# Altium PCB fabrication.PcbDoc
Units mm, origin at the board's own origin, x right, y up, seen from the top; angles counter-clockwise.
Board outline 248.67 x 56.13 mm, 2 copper layers (Top Layer, Bottom Layer), stack 1.621 mm thick; 35 components, 49 nets, 205 pads, 107 vias.
Unrouted connection lines stored in the file: 8.
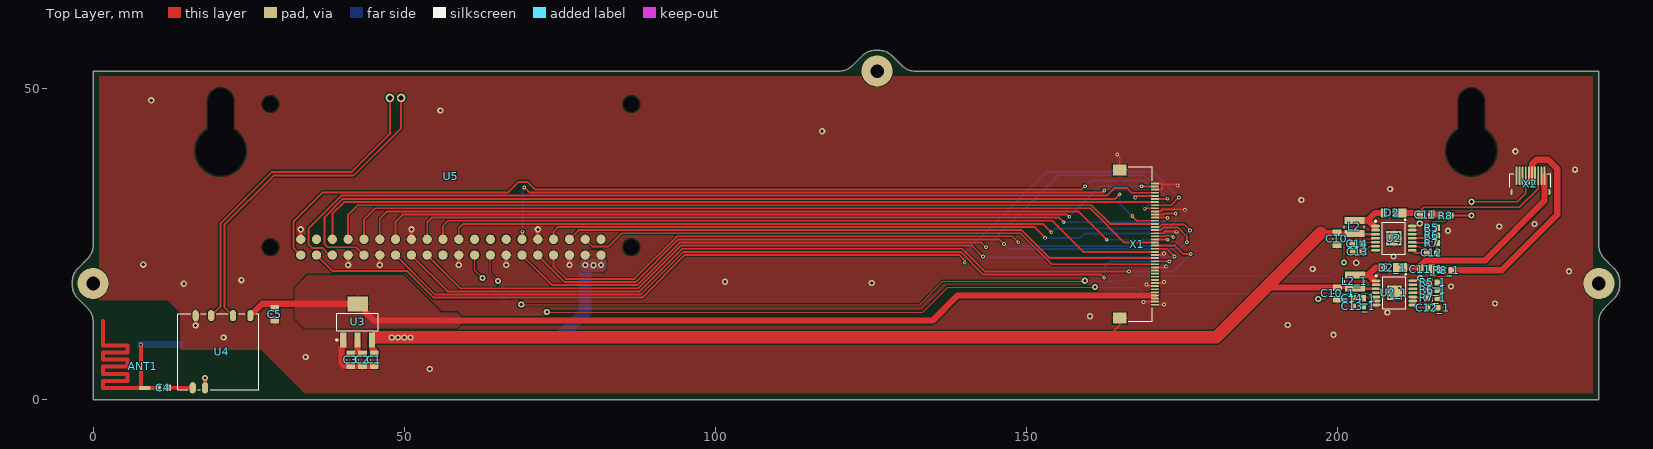
[diagram p0: Top Layer view]
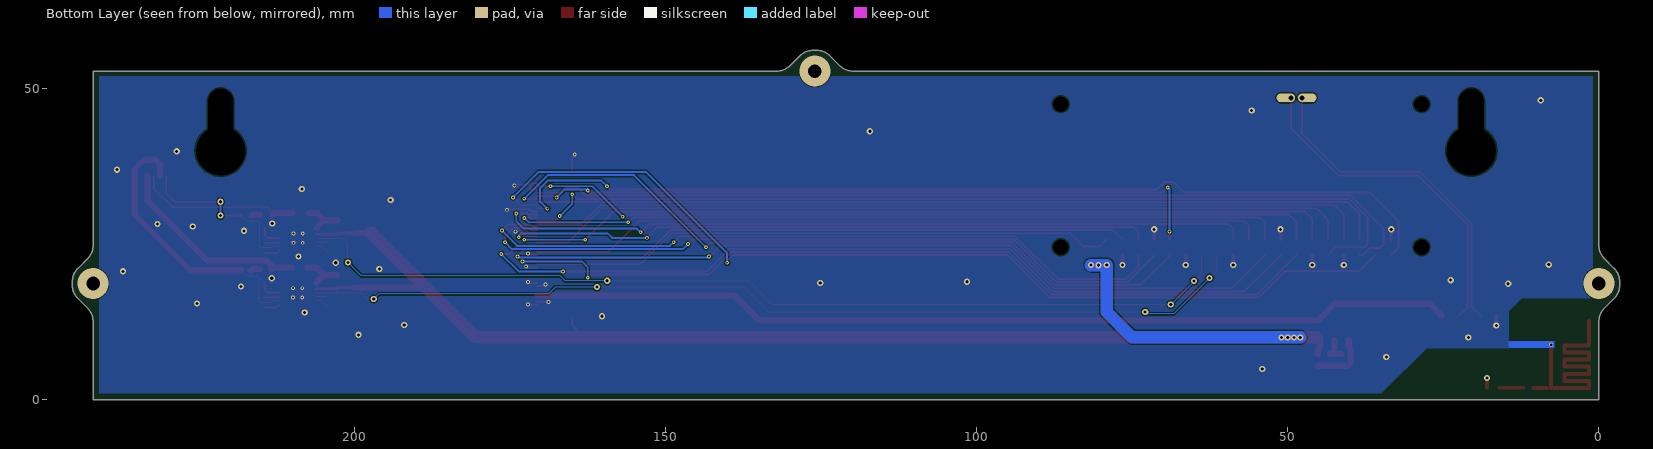
[diagram p1: Bottom Layer view, seen from below]
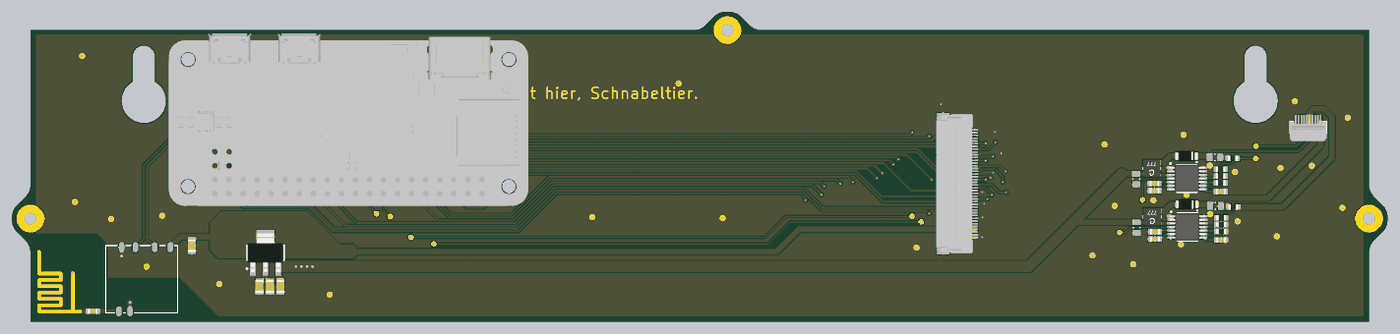
[diagram p2: 3D render of the assembled board from above, using the file's embedded part models]

## Layer stack, top to bottom
Top Solder: solder mask 0.0102, Solder Resist, Dk 3.5
Top Layer: signal copper 0.0356
Dielectric 1: dielectric 1.55, FR-4, Dk 4.8
Bottom Layer: signal copper 0.0356
Bottom Solder: solder mask 0.0102, Solder Resist, Dk 3.5

## Board outline
-0.898,14.708 -2.45,16.26 cw(c-0.316,18.394) -3.334,18.394 -3.334,18.966 cw(c-0.316,18.966) -2.45,21.1 -0.898,22.652 ccw(c-3.066,24.82) 0,24.82 0,52.8 119.86,52.8 ccw(c119.86,55.866) 122.028,53.698 123.58,55.25 cw(c125.714,53.116) 125.714,56.134 126.286,56.134 cw(c126.286,53.116) 128.42,55.25 129.972,53.698 ccw(c132.14,55.866) 132.14,52.8 242,52.8 242,24.82 ccw(c245.066,24.82) 242.898,22.652 244.45,21.1 cw(c242.316,18.966) 245.334,18.966 245.334,18.394 cw(c242.316,18.394) 244.45,16.26 242.898,14.708 ccw(c245.066,12.54) 242,12.54 242,0 0,0 0,12.54 ccw(c-3.066,12.54)

## Design rules (kind name [scope] priority, off if disabled: settings)
Clearance [All] p1: gap=0.2
ComponentClearance [All] p1 off: gap=0.254 collisioncheckmode=3 verticalgap=0.254 showdistances=FALSE
DiffPairsRouting [All] p1: maxlimit=0.3 minlimit=0.3 mostfreqgap=0.3 toplayer_minwidth=0.3 toplayer_maxwidth=0.5 toplayer_prefwidth=0.3 bottomlayer_minwidth=0.3 bottomlayer_maxwidth=0.5 bottomlayer_prefwidth=0.3 maxuncoupledlength=12.7
HoleSize [All] p1: absolutevalues=TRUE maxlimit=6.3 minlimit=0.25 maxpercent=80.000 minpercent=20.000
HoleToHoleClearance [All] p1: gap=0.152 allowstackedmicrovias=TRUE
MinimumSolderMaskSliver [All] p1: minsoldermaskwidth=0.07
PlaneClearance [All] p1: clearance=0.2
PlaneConnect [All] p1: planeconnectstyle=Direct reliefexpansion=0.3 reliefentries=4 reliefconductorwidth=0.5 reliefairgap=0.2
PolygonConnect [All vs isVia] p1: connectstyle=Direct reliefconductorwidth=0.4 reliefentries=4 polygonreliefangle="90 Angle" airgapwidth=0.15
PolygonConnect PolygonConnect_1 [All] p2: connectstyle=Relief reliefconductorwidth=0.4 reliefentries=4 polygonreliefangle="90 Angle" airgapwidth=0.15
RoutingVias [All] p1: holewidth=0.5 width=1 viastyle="Through Hole" minholewidth=0.1 minwidth=0.2 maxholewidth=10 maxwidth=15
SilkToSolderMaskClearance [IsPad] p1: minsilkscreentomaskgap=0.1 clearancetoexposedcopper=TRUE
SolderMaskExpansion [All] p1: expansion=0.051
Width [All] p1: maxlimit=10 minlimit=0.152 preferedwidth=0.5 minimp=50.000000 maximp=50.000000 favimp=50.000000
22 further rules are at their usual default settings.

## Classes and differential pairs
component class main: ANT1 C1 C2 C3 C4 C10 C11 C12 C13 C14 D2 L2 R5 R6 R7 R8 U2 U3 U4 U5 X1 X2
differential pair USB_D: +USB_D_P -USB_D_N

## Components (designator, comment, footprint, x,y, rotation, side; value= is the part's Value field where it differs from the comment)
ANT1 "ESP-ANTENNA" ESP8266_ANT 5,7 r90 top
C1 "10u 25V" C-0805-M 45.2,6.4 r90 top
C2 "10u 25V" C-0805-M 43.3,6.4 r90 top
C3 "10u 25V" C-0805-M 41.4,6.4 r90 top
C4 "NP" C-0603-M 11.3,1.9 r180 top
C5 "10u 25V" C-0805-M 29.2,13.75 r90 top (schematic designator C2)
C10 "NP" C-0805-NP 199.91,25.844 r270 top
C10_1 "NP" C-0805-NP 200,17.069 r270 top (schematic designator C10)
C11 "NP" C-0805-NP 214.134,29.755 r180 top
C11_1 "NP" C-0805-NP 214.224,20.98 r180 top (schematic designator C11)
C12 "NP" C-0603-M 215.175,23.583 r0 top
C12_1 "NP" C-0603-M 215.265,14.808 r0 top (schematic designator C12)
C13 "NP" C-0603-M 203.212,23.761 r180 top
C13_1 "NP" C-0603-M 203.302,14.986 r180 top (schematic designator C13)
C14 "NP" C-0603-M 203.2,25.044 r180 top
C14_1 "NP" C-0603-M 203.302,16.281 r180 top (schematic designator C14)
D2 "DFLS240L" powerdi-123 209.003,30.009 r180 top
D2_1 "DFLS240L" powerdi-123 209.093,21.234 r180 top (schematic designator D2)
L2 "15u" XFL3012 202.704,27.774 r180 top
L2_1 "15u" XFL3012 202.794,18.999 r180 top (schematic designator L2)
R5 "0" R-0603-M 215.175,27.622 r0 top
R5_1 "0" R-0603-M 215.265,18.847 r0 top (schematic designator R5)
R6 "0" R-0603-M 215.175,26.403 r180 top
R6_1 "0" R-0603-M 215.265,17.628 r180 top (schematic designator R6)
R7 "0" R-0603-M 215.175,25.158 r0 top
R7_1 "0" R-0603-M 215.265,16.383 r0 top (schematic designator R7)
R8 "0" R-0603-M 217.36,29.578 r0 top
R8_1 "0" R-0603-M 217.449,20.803 r0 top (schematic designator R8)
U2 "TPS61500PWP14" PWP0014E_N 209.054,25.945 r0 top
U2_1 "TPS61500PWP14" PWP0014E_N 209.144,17.17 r0 top (schematic designator U2)
U3 "AMS1117" SOT223-4 42.5,12.5 r90 top
U4 "RTL8188ETV" RTL8188ETV 20.1,7.7 r90 top
U5 "RPI Zero" PIZERO 90,51 r180 top
X1 "40P-0.5" 40P-0.5-Pollin 170,25 r90 top
X2 "FPC-0.5" 10P-0.5 231,36 r0 top

## Footprints (in the part's own frame and the unit in brackets; to place one, negate y for a bottom-side part, rotate by r counter-clockwise, add the part's x,y. Pads: shape width x height; smd on the part's side, far side on the other; paste and mask are expansions set on the pad)
10P-0.5 [mm]
  oval 0.3x1 smd: 0(-3.04,-2.65) 0(3.04,-2.65)
  oval 0.3x3 smd: 1(-2.25,0) 2(-1.75,0) 3(-1.25,0) 4(-0.75,0) 5(-0.25,0) 6(0.25,0) 7(0.75,0) 8(1.25,0) 9(1.75,0) 10(2.25,0)
  silkscreen extent -3.3,-1.9 3.3,0.3, body extent -3.35,-3.3 3.35,0.3, height 1.89
40P-0.5-Pollin [mm]
  rect 1.8x2.2 smd: 0(-11.9,5) 0(11.9,5)
  oval 0.3x1.3 smd: 1(-9.75,-0.65) 2(-9.25,-0.65) 3(-8.75,-0.65) 4(-8.25,-0.65) 5(-7.75,-0.65) 6(-7.25,-0.65) 7(-6.75,-0.65) 8(-6.25,-0.65) 9(-5.75,-0.65) 10(-5.25,-0.65) 11(-4.75,-0.65) 12(-4.25,-0.65) 13(-3.75,-0.65) 14(-3.25,-0.65) 15(-2.75,-0.65) 16(-2.25,-0.65) 17(-1.75,-0.65) 18(-1.25,-0.65) 19(-0.75,-0.65) 20(-0.25,-0.65) 21(0.25,-0.65) 22(0.75,-0.65) 23(1.25,-0.65) 24(1.75,-0.65) 25(2.25,-0.65) 26(2.75,-0.65) 27(3.25,-0.65) 28(3.75,-0.65) 29(4.25,-0.65) 30(4.75,-0.65) 31(5.25,-0.65) 32(5.75,-0.65) 33(6.25,-0.65) 34(6.75,-0.65) 35(7.25,-0.65) 36(7.75,-0.65) 37(8.25,-0.65) 38(8.75,-0.65) 39(9.25,-0.65) 40(9.75,-0.65)
  silkscreen extent -12.4,-0.2 12.4,3.6, body extent -12.45,-0.93 12.45,6.27, height 2.6
C-0603-M [mm] "Chip Resistor, Body 1.6x0.8mm, IPC Medium Density"
  rect 0.9x1 smd: 1(-0.8,0) 2(0.8,0)
  silkscreen extent -0.05,-0.4 0.05,0.4, body extent -0.85,-0.45 0.85,0.45, height 0.9
C-0805-M [mm] "Chip Resistor, Body 2.0x1.3mm, IPC Medium Density"
  rect 1.05x1.4 smd: 1(-0.95,0) 2(0.95,0)
  silkscreen extent -0.05,-0.6 0.05,0.6, body extent -1.1,-0.72 1.1,0.73, height 1.35
C-0805-NP [mm] "Chip Resistor, Body 2.0x1.3mm, IPC Medium Density"
  rect 1.05x1.4 smd: 1(-0.95,0) 2(0.95,0)
  silkscreen extent -0.05,-0.6 0.05,0.6
ESP8266_ANT [mil] "ESP8266_ANT"
  oval 25x75 smd paste-78.74: 1(-202.13,-130)
  round 25 hole 16 paste-78.74: 2(72.87,-105)
  Top Layer lines w25: 222.87,135 67.87,135 67.87,-20 22.87,-20 22.87,135 -22.13,135 -22.13,-20 -67.13,-20 -67.13,135 -112.13,135 -112.13,-20 -157.13,-20 -157.13,135 -202.13,135 -202.13,-105 72.87,-105
PIZERO [mm]
  round 1 hole 2.5 unplated: 0(3.5,26.5) 0(3.5,3.5) 0(61.5,3.5) 0(61.5,26.5)
  round 1.5 smd: 1(8.37,25.23) 2(8.37,27.77) 3(10.91,25.23) 4(10.91,27.77) 5(13.45,25.23) 6(13.45,27.77) 7(15.99,25.23) 8(15.99,27.77) 9(18.53,25.23) 10(18.53,27.77) 11(21.07,25.23) 12(21.07,27.77) 13(23.61,25.23) 14(23.61,27.77) 15(26.15,25.23) 16(26.15,27.77) 17(28.69,25.23) 18(28.69,27.77) 19(31.23,25.23) 20(31.23,27.77) 21(33.77,25.23) 22(33.77,27.77) 23(36.31,25.23) 24(36.31,27.77) 25(38.85,25.23) 26(38.85,27.77) 27(41.39,25.23) 28(41.39,27.77) 29(43.93,25.23) 30(43.93,27.77) 31(46.47,25.23) 32(46.47,27.77) 33(49.01,25.23) 34(49.01,27.77) 35(51.55,25.23) 36(51.55,27.77) 37(54.09,25.23) 38(54.09,27.77) 39(56.63,25.23) 40(56.63,27.77)
  oval 3x1.4 smd far side: 51(39.7,2.5) 52(43.1,2.5)
  round 1.4 hole 0.8: 51(40.5,2.5) 52(42.3,2.5)
  body extent 0,-1.2 65,30.03, height 4.55
powerdi-123 [mm] "SODFL, 2-Leads, Body 1,78x3,70mm, IPC Medium Density"
  rect 2.2x1.4 smd: 1(-0.95,0)
  rect 0.9x1.4 smd: 2(1.6,0)
  silkscreen extent -1.93,1.02 -1.77,1.18, body extent -1.95,-0.96 1.95,0.97, height 1
PWP0014E_N [mm] "SOP, 14-Leads, Body 5.1x4.5mm, Pitch 0.65mm, Thermal Pad 2.46x2.31mm, IPC Medium Density"
  oval 1.4x0.45 smd: 1(-2.95,1.95) 2(-2.95,1.3) 3(-2.95,0.65) 4(-2.95,0) 5(-2.95,-0.65) 6(-2.95,-1.3) 7(-2.95,-1.95) 8(2.95,-1.95) 9(2.95,-1.3) 10(2.95,-0.65) 11(2.95,0) 12(2.95,0.65) 13(2.95,1.3) 14(2.95,1.95)
  rrect4% 2.46x2.36 smd: 15(0,0)
  silkscreen extent -3.07,-2.55 1.85,2.85, body extent -3.21,-2.5 3.21,2.5, height 1
R-0603-M [mm] "Chip Resistor, Body 1.6x0.8mm, IPC Medium Density"
  rect 0.9x1 smd: 1(-0.8,0) 2(0.8,0)
  silkscreen extent -0.05,-0.4 0.05,0.4, body extent -0.87,-0.47 0.88,0.48, height 0.55
RTL8188ETV [mm]
  oval 1.8x1 smd: 1(5.8,-5.18) 2(5.8,-2.38) 3(5.8,1.12) 4(5.8,3.62) 5(-5.8,4.1) 6(-5.8,2.1)
  silkscreen extent -6.1,-6.5 6.1,6.5, body extent -6.1,-6.5 6.1,6.5, height 1.5
SOT223-4 [mm] "SOT223, 4-Leads, Body 6.5x3.5mm, Pitch 2.3mm, Lead Span 7mm, IPC Medium Density"
  rect 2.4x1 smd: 1(-2.9,2.3) 2(-2.9,0) 3(-2.9,-2.3)
  rect 2.4x3.3 smd: 4(2.9,0)
  silkscreen extent -3.02,-3.35 1.4,3.47, body extent -3.48,-3.25 3.48,3.25, height 1.7
XFL3012 [mm]
  rect 3.2x1.12 smd: 1(0,1.04) 2(0,-1.04)
  silkscreen extent -1.6,-0.2 1.6,0.2, body extent -1.6,-1.6 1.6,1.6, height 1.29

## Part data
ANT1: library part ESP-ANT
C1 C2 C3 C5: library part C-0805-10u-25V, "Capacitor 10u 25V"
C4 C12 C12_1 C13 C13_1 C14 C14_1: library part C-0603-NP, "Capacitor NP"
C10 C10_1 C11 C11_1: library part C-0805-NP
D2 D2_1: library part S-DFLS240L, "DFLS240L Schottky Diode"
L2 L2_1: library part L-XFL3012-153, "XFL3012-153MEB"
R5 R5_1 R6 R6_1 R7 R7_1 R8 R8_1: library part R-0603-0, "Resistor 0"
U2 U2_1: library part TI-TPS61500PWP14-1830X2055TP
U3: "3v3 reg"
U4: "USB WIFI MOD"
U5: library part RPI-REFLOW
X1: library part 40-0.5, "FPC connector 0.5mm pitch"
X2: library part 10-0.5mm, "FPC connector 0.5mm pitch"

## Free pads (board coordinates)
  round 1 hole 8 unplated: 0(20.5,40) 0(221.5,40)
  round 1 hole 4 slot 10 at 90 deg unplated: 0(20.5,45) 0(221.5,45)
  round 5 hole 2.2: 1(0,18.68) 1(126,52.8) 1(242,18.68)

## Via types
v1: diameter 0.6, hole 0.3, Top Layer to Bottom Layer, tented both sides, 42 vias
v2: diameter 1, hole 0.5, Top Layer to Bottom Layer, 40 vias
v3: diameter 1, hole 0.5, Top Layer to Bottom Layer, tented both sides, 17 vias
v4: diameter 0.6, hole 0.3, Top Layer to Bottom Layer, 8 vias

## Nets (pads, with @x,y where several pads share a name; then routed paths per layer and width w, separated by ;. In a path a pad name is that pad's centre, name@x,y a point inside that pad or via, vN(x,y) a via of type N, cw(c..) or ccw(c..) an arc to the next point about the centre after c; other vN are vias at no path point)
3V3: C2.2 C3.2 C5.2 U3.2 U3.4 U4.1 X1.3 X1.4 X1.5 | length 153.1
  Top Layer w1: U4.1 27.18,15.4 U3.4 45.2,12.7 134.9,12.7 138.95,16.75 X1.4 ; C3.2 42.5,7.35 ; U3.2 42.5,7.35 ; C2.2 42.5,7.35
5V: C1.2 C10.1 L2.1 U2.3 U3.3 U5.2 U5.4 | length 213.1
  Top Layer w0.45: L2.1@202.843,26.595 U2.3
  Top Layer w0.5: 197.279,26.794 C10.1 202.644,26.794 L2.1 L2.1@202.843,26.595
  Top Layer w1: U3.3 44.8,8.3 45.2,7.9 C1.2
  Top Layer w2: U3.3@45.3,10 v3(48,10) v3(49,10) v3(50,10) v3(51,10) 180.485,10 197.279,26.794
  Bottom Layer w2: v3(48,10) v3(49,10) v3(50,10) v3(51,10) 75,10 79.09,14.09 v3(79.09,21.63) v3(81.63,21.63)
  other v3: 80.4,21.6
B0: U5.7 X1.23 | length 105.7
  Top Layer w0.3: U5.7 74.01,27.01 74.75,27.75 151.25,27.75 v1(153,26) ; X1.23 172.331,26.25 172.431,26.35 173.35,26.35 v1(173.6,26.1)
  Bottom Layer w0.3: v1(153,26) 158.6,26 159.3,26.7 173.3,26.7 173.6,26.4 v1(173.6,26.1)
B1: U5.29 X1.22 | length 134.4
  Top Layer w0.3: U5.29 46.07,29.07 47.25,30.25 158.35,30.25 v1(162.9,25.7) ; X1.22 172.65,25.75 v1(172.7,25.7)
  Bottom Layer w0.3: v1(162.9,25.7) v1(172.7,25.7)
B2: U5.31 X1.21 | length 133.3
  Top Layer w0.3: U5.31 43.53,28.93 45.35,30.75 160.243,30.75 165.743,25.25 X1.21
B3: U5.26 X1.20 | length 139.5
  Top Layer w0.3: U5.26 56.98,17.4 87.828,17.4 94.678,24.25 139.65,24.25 143.3,20.6 v1(166.5,20.6) ; X1.20 173.85,24.75 175.2,23.4 v1(176.4,23.4)
  Bottom Layer w0.3: v1(166.5,20.6) 173.6,20.6 v1(176.4,23.4)
B4: U5.24 X1.19 | length 129.7
  Top Layer w0.3: U5.24 59.02,17.9 87.621,17.9 94.471,24.75 141.25,24.75 v1(143,23) ; X1.19 172.55,24.25 v1(173.8,23)
  Bottom Layer w0.3: v1(143,23) 143.15,22.85 173.65,22.85 v1(173.8,23)
B5: U5.21 X1.18 | length 119
  Top Layer w0.3: U5.21 56.23,27.93 57.05,28.75 154.15,28.75 159.15,23.75 X1.18
DATAEN: U5.28 X1.15 | length 136
  Top Layer w0.3: U5.28 54.94,16.9 88.036,16.9 94.886,23.75 139.443,23.75 143.093,20.1 162,20.1 v1(162.5,19.6) ; X1.15 172.95,22.25 v1(173,22.2)
  Bottom Layer w0.3: v1(162.5,19.6) 162.5,21.3 163.4,22.2 v1(173,22.2)
DCLK: U5.27 X1.39 | length 127.5
  Top Layer w0.3: U5.27 48.61,28.61 49.75,29.75 156.55,29.75 v1(156.9,29.4) ; v1(168.5,34.3) 168.55,34.25 X1.39
  Bottom Layer w0.3: v1(156.9,29.4) 161.8,34.3 v1(168.5,34.3)
G0: U5.19 X1.30 | length 123.2
  Top Layer w0.3: U5.19 58.77,27.57 59.45,28.25 152.65,28.25 v1(154,26.9) ; X1.30 171.95,29.75 172.1,29.9 v1(174,29.9)
  Bottom Layer w0.3: v1(154,26.9) 154.6,27.5 172.8,27.5 174,28.7 v1(174,29.9)
G1: U5.23 X1.29 | length 124.7
  Top Layer w0.3: U5.23 53.69,28.49 54.45,29.25 155.25,29.25 v1(156,28.5) ; X1.29 172.65,29.25 v1(172.7,29.2)
  Bottom Layer w0.3: v1(156,28.5) 172,28.5 v1(172.7,29.2)
G2: U5.32 X1.28 | length 149
  Top Layer w0.3: U5.32 42.26,24.5 37.7,24.5 37.2,25 37.2,29.307 40.143,32.25 164.25,32.25 v1(165,33) ; v1(167,29.5) 167.75,28.75 X1.28
  Bottom Layer w0.3: v1(165,33) 165,31.5 v1(167,29.5)
G3: U5.33 X1.27 | length 135.5
  Top Layer w0.3: U5.33 40.99,29.69 42.55,31.25 160.45,31.25 163.45,28.25 X1.27
G4: U5.8 X1.26 | length 115.7
  Top Layer w0.3: U5.8 74.01,21.39 76,19.4 87,19.4 93.85,26.25 147.75,26.25 v1(148.7,25.3) ; X1.26 171.357,27.75 171.757,28.15 175.35,28.15 v1(176.3,27.2)
  Bottom Layer w0.3: v1(148.7,25.3) 149.3,24.7 173.8,24.7 v1(176.3,27.2)
G5: U5.10 X1.25 | length 116.9
  Top Layer w0.3: U5.10 71.47,23.223 75.793,18.9 87.207,18.9 94.057,25.75 145.65,25.75 v1(146.4,25) ; X1.25 171.564,27.25 171.964,27.65 174.369,27.65 175.8,26.219 v1(175.8,25.3)
  Bottom Layer w0.3: v1(146.4,25) 147.2,24.2 174.7,24.2 v1(175.8,25.3)
GND: ANT1.2 C1.1 C2.1 C3.1 C5.1 C10.2 C10_1.2 C11.1 C11_1.1 C12.2 C12_1.2 C13.2 C13_1.2 C14.2 C14_1.2 pad.1 R5_1.2 R6.1 R6_1.1 R7.2 R7_1.2 R8.1 R8_1.1 U2.7 U2.12 U2.13 U2.14 U2.15 U2_1.7 U2_1.12 U2_1.13 U2_1.14 U2_1.15 U3.1 U4.4 U4.6 U5.6 U5.9 U5.14 U5.20 U5.25 U5.30 U5.34 U5.39 X1.0 X1.1 X1.2 X1.7 X1.8 X1.13 X1.17 X1.24 X1.31 X1.38 X1.40 X2.0 X2.1 | length 57.4
  Top Layer w0.3: 164.13,11.07 165,11.94 X1.0@165,13.1 ; v1(164.6,39.4) 165,39 X1.0@165,36.9 ; v1(168.8,15.7) 168.85,15.75 X1.2 ; v1(169.3,18.5) 169.55,18.25 X1.7 ; X1.1 172.05,15.25 v1(172.1,15.3) ; X1.8 171.95,18.75 v1(172.1,18.9) ; X1.13 172.25,21.25 v1(172.4,21.4) ; X1.17 171.85,23.25 v1(172.1,23.5) ; X1.24 171.95,26.75 172.2,27 v1(174.1,27) ; X1.31 171.55,30.25 171.9,30.6 175.4,30.6 v1(175.5,30.5) ; X1.38 171.65,33.75 171.8,33.9 171.8,34.6 ; X1.40 171.65,34.75 171.8,34.6 ; v1(174.3,34.4) 174.1,34.6 171.8,34.6
  Top Layer w0.6: v3(16.48,11.9) U4.4 ; U4.6 v3(18,3.5) ; U5.39 v3(33.37,27.37) ; v3(40.99,21.63) U5.34 ; v3(46.07,21.63) U5.30 ; U5.25 v3(51.15,27.37) ; v3(58.77,21.63) U5.20 ; v3(66.39,21.63) U5.14 ; U5.9 v3(71.47,27.37) ; v3(76.55,21.63) U5.6
  Top Layer w1: U3.1 40.2,8.5 39.9,8.2 39.9,5.9 40.35,5.45 C3.1 C2.1 C1.1 ; C11.1 216.382,29.755 R8.1 ; C11_1.1 216.472,20.98 R8_1.1
  other v2: 54.102,4.928 34.163,6.858 20.98,9.982 199.365,10.414 192,12 160.198,13.411 208,14 225.323,15.469 218.237,18.186 14.58,18.618 125.146,18.745 101.575,18.948 23.825,19.202 213.284,19.507 237.185,20.625 196,21 8.052,21.692 203,22 209,23 217.754,27.127 225.984,27.838 231.648,28.245 213.208,28.296 194.183,32.106 208.458,33.858 238.15,36.957 228.575,39.903 117.17,43.129 55.804,46.457 9.347,48.108
  other v4: 208.394,16.42 209.894,16.42 208.394,17.92 209.894,17.92 208.304,25.195 209.804,25.195 208.304,26.695 209.804,26.695
HSYNC: U5.5 X1.16 | length 96.6
  Top Layer w0.3: U5.5 78.03,27.25 149.25,27.25 153.75,22.75 X1.16
LEDR+: C11.2 D2.1 R5.2 X2.8 | length 3.3
  Top Layer w1: D2.1 212.93,30.009 C11.2
LEDR-: R8.2 U2.9 X2.4 | length 51.4
  Top Layer w0.15: 217.22,28.638 R8.2
  Top Layer w0.152: U2.9 213.021,24.645 213.285,24.382 215.009,24.382 215.201,24.574 215.201,28.409 215.429,28.638 217.22,28.638
  Top Layer w0.3: 212.93,30.009 213.832,30.912 229.235,30.912 232.25,33.927 232.25,36 ; R8.2 218.173,29.591 v2(221.539,29.591) ; v2(221.539,31.801) 228.854,31.801 230.25,33.197 X2.4
  Bottom Layer w0.3: v2(221.539,29.591) v2(221.539,31.801)
LEDW+: X2.9 X2.10
LEDW-: X2.5 X2.6 X2.7 | length 52.5
  Top Layer w1: 218.249,20.803 226.39,20.803 235.306,29.718 235.306,37.084 233.832,38.557 231.953,38.557 231.25,37.854 X2.6 ; 223.71,22.39 233.25,31.93 233.25,36
NetANT1_1: ANT1.1 C4.2 | length 2.2
  Top Layer w0.6: ANT1.1 C4.2@10.5,1.866
NetC4_1: C4.1 U4.5 | length 3.9
  Top Layer w0.6: C4.1 U4.5
NetC7_1: 
NetC8_1: 
NetC9_1: 
NetC12_1: C12.1 U2.8 | length 2.5
  Top Layer w0.3: U2.8 212.416,23.583 C12.1
NetC13_1: C13.1 U2.6 | length 2.5
  Top Layer w0.152: C13.1 204.33,23.761 205.214,24.645 U2.6
NetC14_1: C14.1 U2.5 | length 2.2
  Top Layer w0.152: C14.1@204.012,25.133 204.175,25.295 U2.5
NetD1_2: 
NetD2_2: D2.2 L2.2 U2.1 U2.2 | length 7
  Top Layer w1: L2.2 204.864,28.814 ; 206.057,27.571 206.082,27.596 204.864,28.814 ; D2.2 206.06,30.009 204.864,28.814
NetR1_1: 
NetR3_1: 
NetR5_1: R5.1 R6.2 U2.11 | length 3.8
  Top Layer w0.3: U2.11 212.004,26.008 213.981,26.008 R6.2 R5.1
NetR7_1: R7.1 U2.10 | length 2.5
  Top Layer w0.3: U2.10 212.079,25.22 214.375,25.22 R7.1
NTC: X2.2
PWM1: U5.16 | length 153.4
  Top Layer w0.2: U5.16 63.85,20.249 v2(65.049,19.05) ; v2(68.809,15.291) 132.817,15.291 136.576,19.05 159.334,19.05 v2(159.385,19.101) ; v2(201.041,22.047) 201.041,25.222 201.676,25.857 206.016,25.857
  Bottom Layer w0.2: v2(65.049,19.05) v2(68.809,15.291) ; v2(159.385,19.101) 166.116,19.101 166.903,19.888 198.882,19.888 v2(201.041,22.047)
PWM2: U2.4 U5.18 | length 153.1
  Top Layer w0.2: U5.18 61.31,20.808 v2(62.56,19.558) ; v2(72.923,14.072) 133.325,14.072 137.338,18.085 v2(161.036,18.085) ; v2(196.901,16.154) 197.917,16.154 198.857,17.094 206.117,17.094
  Bottom Layer w0.2: v2(62.56,19.558) 68.351,13.767 72.619,13.767 v2(72.923,14.072) ; v2(161.036,18.085) 167.716,18.085 168.808,16.993 196.063,16.993 v2(196.901,16.154)
R0: U5.36 X1.37 | length 146.1
  Top Layer w0.3: U5.36 37.97,23.23 36.8,24.4 35.2,24.4 34.6,25 34.6,27.5 39.9,32.8 162.9,32.8 164.1,34 166.2,34 166.95,33.25 X1.37
R1: U5.11 X1.36 | length 111
  Top Layer w0.3: U5.11 69,25.84 v1(69,27) ; v1(69.3,34.1) 70.1,33.3 162.2,33.3 v1(162.5,33.6) ; v1(167.5,32.5) 167.75,32.75 X1.36
  Bottom Layer w0.3: v1(69,27) 69,33.8 v1(69.3,34.1) ; v1(162.5,33.6) 162.7,33.8 166.2,33.8 v1(167.5,32.5)
R2: U5.12 X1.35 | length 117.4
  Top Layer w0.3: U5.12 73.76,18.4 87.414,18.4 94.264,25.25 142.75,25.25 v1(143.5,24.5) ; X1.35 172.65,32.25 v1(172.7,32.3)
  Bottom Layer w0.3: v1(143.5,24.5) 155.1,36.1 168.9,36.1 v1(172.7,32.3)
R3: U5.35 X1.34 | length 137.1
  Top Layer w0.3: U5.35 38.45,29.85 40.35,31.75 X1.34
R4: U5.38 X1.33 | length 158
  Top Layer w0.3: U5.38 38.44,20.7 50.433,20.7 54.733,16.4 88.243,16.4 95.093,23.25 139.2,23.25 140.1,22.35 v1(140.1,22) ; X1.33 173.25,31.25 v1(174.5,32.5)
  Bottom Layer w0.3: v1(140.1,22) 140.1,23.5 153.2,36.6 170.4,36.6 v1(174.5,32.5)
R5: U5.40 X1.32 | length 153.5
  Top Layer w0.3: U5.40 32.2,24.4 32.2,28.6 36.9,33.3 66.7,33.3 68.4,35 69.8,35 71,33.8 158.9,33.8 v1(159.4,34.3) ; v1(169,30.7) 169.05,30.75 X1.32
  Bottom Layer w0.3: v1(159.4,34.3) 160.3,35.2 168.9,35.2 170.2,33.9 170.2,31.9 v1(169,30.7)
Reset: X1.6
USB_D_N: U4.2 U5.51 | length 54.9
  Top Layer w0.3: U4.2 21.1,14.88 21.1,28.1 29,36 41.849,36 49.5,43.651 U5.51@49.5,48.5
USB_D_P: U4.3 U5.52 | length 54.4
  Top Layer w0.3: U4.3 20.5,15.02 20.5,28.349 28.751,36.6 41.6,36.6 47.7,42.7 U5.52@47.7,48.5
VSYNC: U5.3 X1.14 | length 95
  Top Layer w0.3: U5.3 80.26,24.6 82.8,24.6 84.95,26.75 149.043,26.75 154.043,21.75 X1.14
pads on no net: C10_1.1 C11_1.2 C12_1.1 C13_1.1 C14_1.1 D2_1.1 D2_1.2 L2_1.1 L2_1.2 R5_1.1 R6_1.2 R7_1.1 R8_1.2 U2_1.1 U2_1.2 U2_1.3 U2_1.4 U2_1.5 U2_1.6 U2_1.8 U2_1.9 U2_1.10 U2_1.11 U5.0 U5.1 U5.13 U5.15 U5.17 U5.22 U5.37 X1.9 X1.10 X1.11 X1.12 X2.3
copper on no net: | length 78.7
  Top Layer w0.15: 217.31,19.863 218.249,20.803
  Top Layer w0.152: 204.102,14.986 204.419,14.986 205.304,15.87 206.194,15.87 ; 204.102,16.358 204.264,16.52 206.194,16.52 ; 212.094,15.87 213.111,15.87 213.374,15.607 215.098,15.607 215.29,15.799 215.29,19.634 215.519,19.863 217.31,19.863
  Top Layer w0.3: 212.094,15.22 212.506,14.808 214.465,14.808 ; 212.094,16.52 212.169,16.445 214.465,16.445 214.465,16.383 ; 212.094,17.17 212.094,17.233 214.07,17.233 214.465,17.628 214.465,18.847
  Top Layer w0.45: 202.932,17.82 206.194,17.82
  Top Layer w0.5: 200,18.019 202.734,18.019 202.794,17.959 202.932,17.82
  Top Layer w1: 199.91,26.794 197.177,26.794 188.402,18.019 200,18.019 ; 202.794,20.039 204.954,20.039 ; 206.146,18.796 206.172,18.821 204.954,20.039 ; 207.493,21.234 206.149,21.234 204.954,20.039 ; 210.043,21.234 213.02,21.234 213.274,20.98 213.274,21.478 214.173,22.377 223.723,22.377

## Polygon pours and split planes (outlines as drawn)
GND on Top Layer "Multi-Layer-No Net" (solid, remove dead copper, pour order 8): 1,52 1,16 12,16 14,14 14,8 27,8 34,1 35,1 241,1 241,52 1,52
3V3 on Top Layer "Multi-Layer-No Net" (solid, remove dead copper, pour order 4): 32.434,18 34.434,20 47.934,20 49.934,20 55.934,14 57.934,14 58.434,14 59,13.5 59,12 58.5,11.5 33.934,11.5 32.434,13
5V on Top Layer "Top Layer-No Net" (solid, remove dead copper, pour order 0): 78.3,23.3 cw(c79,23.3) 79,24 81.7,24 cw(c81.7,23.2) 82.5,23.2 82.5,21.3 cw(c81.7,21.3) 81.7,20.5 79.1,20.5 cw(c79.1,21.3) 78.3,21.3
GND on Bottom Layer "Top Layer-No Net" (solid, remove dead copper, pour order 2): 14.5,8.3 27.7,8.3 35,1 241,1 241,52 1,52 1,16.3 12.4,16.3 14.5,14.2
GND on Top Solder "Multi-Layer-No Net" (solid, remove dead copper): 241,1 241,52 1,52 1,16 12,16 14,14 15,14 15,8 28,8 35,1

## Other copper
Bottom Layer:
  rectangle net GND: 7.1,8.3 14.5,9.4

## Silkscreen, mask and mechanical layers (free items; w line width, h text height)
Top Solder:
  text "Ich bin hier, du bist hier, Schnabeltier." at 60.3,40.437 h2
Mechanical 1:
  lines w0.2: -2.35,18.68 0,18.68 ; 121,10.05 121,48.25 ; 242,12.54 cw(c245.066,12.54) 242.898,14.708 244.45,16.26 ccw(c242.316,18.394) 245.334,18.394 245.334,18.966 ccw(c242.316,18.966) 244.45,21.1 242.898,22.652 cw(c245.066,24.82) 242,24.82 242,52.8 132.14,52.8 cw(c132.14,55.866) 129.972,53.698 128.42,55.25 ccw(c126.286,53.116) 126.286,56.134 125.714,56.134 ccw(c125.714,53.116) 123.58,55.25 122.028,53.698 cw(c119.86,55.866) 119.86,52.8 0,52.8 0,24.82 cw(c-3.066,24.82) -0.898,22.652 -2.45,21.1 ccw(c-0.316,18.966) -3.334,18.966 -3.334,18.394 ccw(c-0.316,18.394) -2.45,16.26 -0.898,14.708 cw(c-3.066,12.54) 0,12.54 0,0 242,0 242,12.54 ; 242,12.54 ccw(c242,12.54) 242,12.54 ; 242,12.54 242,12.54